# Altium PCB PowerModule.PcbDoc (part 1 of 3)
Units mm, origin at the board's own origin, x right, y up, seen from the top; angles counter-clockwise.
Board outline 200 x 99.95 mm, 2 copper layers (Top Layer 1, Bottom Layer 1); 228 components, 131 nets, 701 pads, 207 vias.
Unrouted connection lines stored in the file: 344.
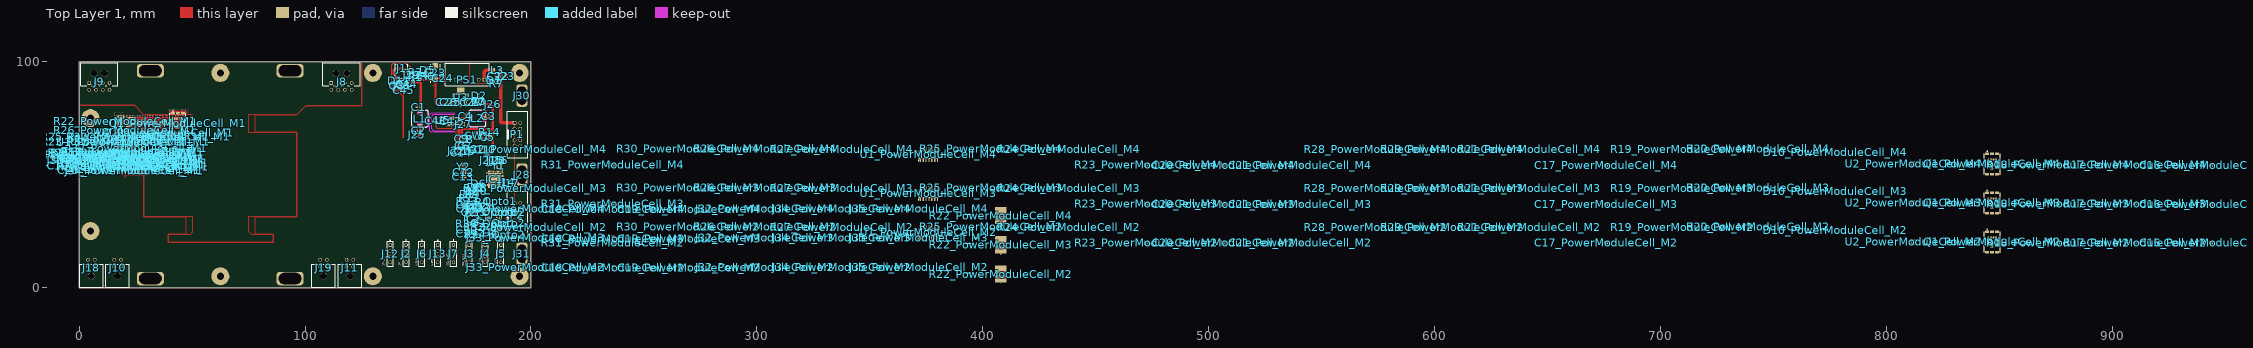
[diagram p0: Top Layer 1 view]
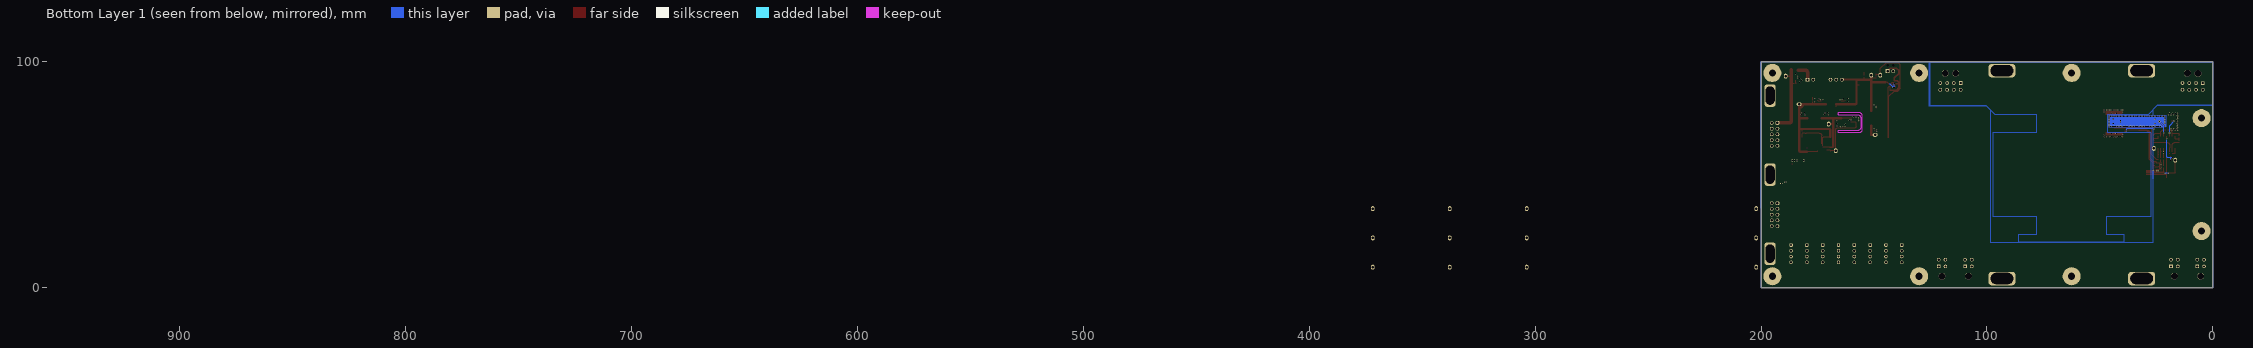
[diagram p1: Bottom Layer 1 view, seen from below]

## Layer stack, top to bottom
Top Solder: solder mask 0.0102, Solder Resist, Dk 3.5
Top Layer 1: signal copper 0.07
Dielectric 1: dielectric 0.32, FR-4, Dk 4.8
Bottom Layer 1: signal copper 0.07
Bottom Solder: solder mask 0.0102, Solder Resist, Dk 3.5

## Board outline
0,0 102.988,0 199.997,0 199.997,99.949 0,99.949
cut-out: 155.194,69.977 155.194,76.073 cw(c156.464,76.073) 156.464,77.343 165.608,77.343 cw(c165.608,76.962) 165.989,76.962 cw(c165.608,76.962) 165.608,76.581 157.226,76.581 ccw(c157.226,75.311) 155.956,75.311 155.956,70.739 ccw(c157.226,70.739) 157.226,69.469 165.608,69.469 cw(c165.608,69.088) 165.989,69.088 cw(c165.608,69.088) 165.608,68.707 156.464,68.707 cw(c156.464,69.977)

## Design rules (kind name [scope] priority, off if disabled: settings)
Clearance [All] p1: gap=0.127 ignorepadtopadclearanceinfootprint=FALSE except(0: Arc-Hole Track-Hole SMDPad-Hole THPad-Hole Via-Hole Fill-Hole Poly-Hole Region-Hole Text-Hole)
PolygonConnect [All] p1: connectstyle=Relief reliefconductorwidth=0.254 reliefentries=4 polygonreliefangle="90 Angle" airgapwidth=0.254
RoomDefinition Opto2 [InComponentClass('Opto2')] p1: confinementstyle=ConfineIn formatcopy=TRUE lockcomponents=FALSE outline 187.579,22.987 187.579,33.782 183.418,33.782 183.418,22.987
RoomDefinition ISO_Signals [InComponentClass('ISO_Signals')] p2: confinementstyle=ConfineIn formatcopy=TRUE lockcomponents=FALSE outline 176.82,22.894 176.82,37.626 170.343,37.626 170.343,22.894
RoomDefinition Opto1 [InComponentClass('Opto1')] p3: confinementstyle=ConfineIn formatcopy=TRUE lockcomponents=FALSE outline 179.504,27.813 183.314,27.813 183.314,38.608 179.504,38.608
RoutingVias [All] p1: holewidth=0.711 width=1.27 viastyle="Through Hole" minholewidth=0.711 minwidth=1.27 maxholewidth=0.711 maxwidth=1.27
SolderMaskExpansion [All] p1: expansion=0.102 istentingtop=FALSE
Width [All] p1: maxlimit=6.35 minlimit=0.127 preferedwidth=0.254
30 further rules are at their usual default settings.

## Classes and differential pairs
component class FanDriver: C44 C45 D11 IC3 Q3
component class Vref-2v5: C42 C43 U5
component class ISO_Signals: C29 C30 C31 C32 IC2
component class LDO_3V3: C25 C26 C27 C28 U3
channel class Optotransistor: Opto1 Opto2
component class Opto2: Q2_Opto2 R33_Opto2 R34_Opto2
component class Opto1: Q2_Opto1 R33_Opto1 R34_Opto1
component class 20V_Isolator: C22 C23 C24 L3 PS1
channel class PowerModuleCell: PowerModuleCell_M1 PowerModuleCell_M2 PowerModuleCell_M3 PowerModuleCell_M4
component class PowerModule: C1 C2 C3 C4 C5 C6 C7 C8 C9 C10 C11 C12 C13 C14 C15 D1 D2 D3 D4 D5 D6 D7 D8 D9 IC1 J1 J2 J3 J4 J5 J6 J7 J8 J9 J10 J11 J12 J13 J14 J15 J16 J17 J18 J19 J20 J21 J22 J23 J24 J25 J26 J27 J28 J29 J30 J31 L1 L2 P1 P2 R1 R2 R3 R4 R5 R6 R7 R8 R9 R10 R11 R12 R13 R14 R15 R16 SW1 Y1 Y2
component class PowerModuleCell_M4: C16_PowerModuleCell_M4 C17_PowerModuleCell_M4 C18_PowerModuleCell_M4 C19_PowerModuleCell_M4 C20_PowerModuleCell_M4 C21_PowerModuleCell_M4 D10_PowerModuleCell_M4 J32_PowerModuleCell_M4 J33_PowerModuleCell_M4 J34_PowerModuleCell_M4 J35_PowerModuleCell_M4 Q1_PowerModuleCell_M4 R17_PowerModuleCell_M4 R18_PowerModuleCell_M4 R19_PowerModuleCell_M4 R20_PowerModuleCell_M4 R21_PowerModuleCell_M4 R22_PowerModuleCell_M4 R23_PowerModuleCell_M4 R24_PowerModuleCell_M4 R25_PowerModuleCell_M4 R26_PowerModuleCell_M4 R27_PowerModuleCell_M4 R28_PowerModuleCell_M4 R29_PowerModuleCell_M4 R30_PowerModuleCell_M4 R31_PowerModuleCell_M4 R32_PowerModuleCell_M4 U1_PowerModuleCell_M4 U2_PowerModuleCell_M4
component class PowerModuleCell_M3: C16_PowerModuleCell_M3 C17_PowerModuleCell_M3 C18_PowerModuleCell_M3 C19_PowerModuleCell_M3 C20_PowerModuleCell_M3 C21_PowerModuleCell_M3 D10_PowerModuleCell_M3 J32_PowerModuleCell_M3 J33_PowerModuleCell_M3 J34_PowerModuleCell_M3 J35_PowerModuleCell_M3 Q1_PowerModuleCell_M3 R17_PowerModuleCell_M3 R18_PowerModuleCell_M3 R19_PowerModuleCell_M3 R20_PowerModuleCell_M3 R21_PowerModuleCell_M3 R22_PowerModuleCell_M3 R23_PowerModuleCell_M3 R24_PowerModuleCell_M3 R25_PowerModuleCell_M3 R26_PowerModuleCell_M3 R27_PowerModuleCell_M3 R28_PowerModuleCell_M3 R29_PowerModuleCell_M3 R30_PowerModuleCell_M3 R31_PowerModuleCell_M3 R32_PowerModuleCell_M3 U1_PowerModuleCell_M3 U2_PowerModuleCell_M3
component class PowerModuleCell_M2: C16_PowerModuleCell_M2 C17_PowerModuleCell_M2 C18_PowerModuleCell_M2 C19_PowerModuleCell_M2 C20_PowerModuleCell_M2 C21_PowerModuleCell_M2 D10_PowerModuleCell_M2 J32_PowerModuleCell_M2 J33_PowerModuleCell_M2 J34_PowerModuleCell_M2 J35_PowerModuleCell_M2 Q1_PowerModuleCell_M2 R17_PowerModuleCell_M2 R18_PowerModuleCell_M2 R19_PowerModuleCell_M2 R20_PowerModuleCell_M2 R21_PowerModuleCell_M2 R22_PowerModuleCell_M2 R23_PowerModuleCell_M2 R24_PowerModuleCell_M2 R25_PowerModuleCell_M2 R26_PowerModuleCell_M2 R27_PowerModuleCell_M2 R28_PowerModuleCell_M2 R29_PowerModuleCell_M2 R30_PowerModuleCell_M2 R31_PowerModuleCell_M2 R32_PowerModuleCell_M2 U1_PowerModuleCell_M2 U2_PowerModuleCell_M2
component class PowerModuleCell_M1: C16_PowerModuleCell_M1 C17_PowerModuleCell_M1 C18_PowerModuleCell_M1 C19_PowerModuleCell_M1 C20_PowerModuleCell_M1 C21_PowerModuleCell_M1 D10_PowerModuleCell_M1 J32_PowerModuleCell_M1 J33_PowerModuleCell_M1 J34_PowerModuleCell_M1 J35_PowerModuleCell_M1 Q1_PowerModuleCell_M1 R17_PowerModuleCell_M1 R18_PowerModuleCell_M1 R19_PowerModuleCell_M1 R20_PowerModuleCell_M1 R21_PowerModuleCell_M1 R22_PowerModuleCell_M1 R23_PowerModuleCell_M1 R24_PowerModuleCell_M1 R25_PowerModuleCell_M1 R26_PowerModuleCell_M1 R27_PowerModuleCell_M1 R28_PowerModuleCell_M1 R29_PowerModuleCell_M1 R30_PowerModuleCell_M1 R31_PowerModuleCell_M1 R32_PowerModuleCell_M1 U1_PowerModuleCell_M1 U2_PowerModuleCell_M1

## Components (designator, comment, footprint, x,y, rotation, side; value= is the part's Value field where it differs from the comment)
C1 "2.2uF, 25V, X5R, 0603" FP-GRM188-0_1-E0_2_0_5-MFG 150.3,79.866 r180 top
C2 "220nF 25V, X7R, 0603" FP-GCM188-0_1-IPC_B 150.3,69.452 r180 top
C3 "2.2uF, 25V, X5R, 0603" FP-GRM188-0_1-E0_2_0_5-MFG 181.356,75.8 r90 top
C4 "220nF 25V, X7R, 0603" FP-GCM188-0_1-IPC_B 171.141,75.8 r90 top
C5 "100nF, 50v, X7R, 0402" CAPC2012X88N 180.903,66.455 r0 top
C6 "10nF, 50V, X7R, 0603" CAPC1608X87N 169.532,62.763 r270 top
C7 "1uF, 50V, X5R, 0402" GRM15X 170.985,62.57 r270 top
C8 "100nF, 50v, X7R, 0402" CAPC2012X88N 171.475,65.768 r90 top
C9 "4.7uF, 50V, X5R, 0805" CAPC2012X145N 169.391,65.773 r90 top
C10 "100nF, 50v, X7R, 0402" CAPC2012X88N 179.705,60.96 r270 top
C11 "4.7uF, 50V, X5R, 0805" CAPC2012X145N 177.583,60.96 r270 top
C12 "100nF, 50v, X7R, 0402" CAPC2012X88N 170.218,51.054 r0 top
C13 "4.7uF, 50V, X5R, 0805" CAPC2012X145N 170.121,48.97 r0 top
C14 "100nF, 50v, X7R, 0402" CAPC2012X88N 169.232,59.759 r90 top
C15 "1uF, 50V, X5R, 0402" GRM15X 170.96,60.263 r90 top
C16_PowerModuleCell_M1 "100nF, 25v, X5R, 0402" FP-GRM155-0_05-IPC_C#1 23.622,58.85 r0 top (schematic designator C16)
C16_PowerModuleCell_M2 "100nF, 25v, X5R, 0402" FP-GRM155-0_05-IPC_C#2 943.864,19.812 r90 top (schematic designator C16)
C16_PowerModuleCell_M3 "100nF, 25v, X5R, 0402" FP-GRM155-0_05-IPC_C#2 943.864,36.957 r90 top (schematic designator C16)
C16_PowerModuleCell_M4 "100nF, 25v, X5R, 0402" FP-GRM155-0_05-IPC_C#2 943.864,54.229 r90 top (schematic designator C16)
C17_PowerModuleCell_M1 "100nF, 25v, X5R, 0402" FP-GRM155-0_05-IPC_C#1 35.179,66.675 r270 top (schematic designator C17)
C17_PowerModuleCell_M2 "100nF, 25v, X5R, 0402" FP-GRM155-0_05-IPC_C#2 676.021,19.812 r90 top (schematic designator C17)
C17_PowerModuleCell_M3 "100nF, 25v, X5R, 0402" FP-GRM155-0_05-IPC_C#2 676.021,36.957 r90 top (schematic designator C17)
C17_PowerModuleCell_M4 "100nF, 25v, X5R, 0402" FP-GRM155-0_05-IPC_C#2 676.021,54.229 r90 top (schematic designator C17)
C18_PowerModuleCell_M1 "100nF, 50v, X7R, 0402" CAPC2012X88N 19.495,57.541 r0 top (schematic designator C18)
C18_PowerModuleCell_M2 "100nF, 50v, X7R, 0402" CAPC2012X88N 236.347,8.763 r90 top (schematic designator C18)
C18_PowerModuleCell_M3 "100nF, 50v, X7R, 0402" CAPC2012X88N 236.347,21.717 r90 top (schematic designator C18)
C18_PowerModuleCell_M4 "100nF, 50v, X7R, 0402" CAPC2012X88N 236.347,34.671 r90 top (schematic designator C18)
C19_PowerModuleCell_M1 "100nF, 50v, X7R, 0402" CAPC2012X88N 17.427,54.012 r180 top (schematic designator C19)
C19_PowerModuleCell_M2 "100nF, 50v, X7R, 0402" CAPC2012X88N 270.002,8.763 r90 top (schematic designator C19)
C19_PowerModuleCell_M3 "100nF, 50v, X7R, 0402" CAPC2012X88N 270.002,21.717 r90 top (schematic designator C19)
C19_PowerModuleCell_M4 "100nF, 50v, X7R, 0402" CAPC2012X88N 270.002,34.671 r90 top (schematic designator C19)
C20_PowerModuleCell_M1 "470nF, 50v, X7R, 0603" FP-C1608-080-0_1-IPC_C 22.281,51.835 r180 top (schematic designator C20)
C20_PowerModuleCell_M2 "470nF, 50v, X7R, 0603" FP-C1608-080-0_1-IPC_C 506.603,19.812 r90 top (schematic designator C20)
C20_PowerModuleCell_M3 "470nF, 50v, X7R, 0603" FP-C1608-080-0_1-IPC_C 506.603,36.957 r90 top (schematic designator C20)
C20_PowerModuleCell_M4 "470nF, 50v, X7R, 0603" FP-C1608-080-0_1-IPC_C 506.603,54.229 r90 top (schematic designator C20)
C21_PowerModuleCell_M1 "470nF, 50v, X7R, 0603" FP-C1608-080-0_1-IPC_C 22.281,55.293 r180 top (schematic designator C21)
C21_PowerModuleCell_M2 "470nF, 50v, X7R, 0603" FP-C1608-080-0_1-IPC_C 540.512,19.812 r90 top (schematic designator C21)
C21_PowerModuleCell_M3 "470nF, 50v, X7R, 0603" FP-C1608-080-0_1-IPC_C 540.512,36.957 r90 top (schematic designator C21)
C21_PowerModuleCell_M4 "470nF, 50v, X7R, 0603" FP-C1608-080-0_1-IPC_C 540.512,54.229 r90 top (schematic designator C21)
C22 "4.7uF, 25V, X5S, 0805" CAPC2012X145N 185.45,93.517 r0 top
C23 "10uF, 50V, 10%, 2917" T491D 157.71,95.123 r90 top
C24 "1uF, 50V, X5R, 0402" GRM15X 160.935,92.71 r270 top
C25 "1uF, 50V, X5R, 0402" GRM15X 164.592,82 r270 top
C26 "100nF, 50v, X7R, 0402" CAPC2012X88N 162.814,82 r270 top
C27 "100nF, 50v, X7R, 0402" CAPC2012X88N 175.031,82 r270 top
C28 "1uF, 50V, X5R, 0402" GRM15X 173.329,82 r270 top
C29 "100nF, 50v, X7R, 0402" CAPC2012X88N 171.74,23.73 r180 top
C30 "10nF, 50V, X7R, 06023" CAPC1608X87N 171.867,25.565 r180 top
C31 "10nF, 50V, X7R, 06023" CAPC1608X87N 171.867,34.903 r180 top
C32 "100nF, 50v, X7R, 0402" CAPC2012X88N 171.867,36.737 r180 top
C42 "10uF, 50V, X5R, 1206" FP-CL32-IPC_B 164.541,73.719 r270 top
C43 "4.7uF, 50V, X5R, 0805" CAPC2012X145N 157.959,73.914 r270 top
C44 "4.7uF, 50V, X5R, 0805" CAPC2012X145N 145.012,90.049 r90 top
C45 "4.7uF, 50V, X5R, 0805" CAPC2012X145N 143.764,87.39 r180 top
D1 "150060YS75000" WL-SMCW_0603_150060XX75000 183.692,91.694 r0 top
D2 "150060AS75000" WL-SMCW_0603_150060XX75000 177.038,85.001 r270 top
D3 "150060RS75000" WL-SMCW_0603_150060XX75000 178.811,35.318 r90 top
D4 "150060RS75000" WL-SMCW_0603_150060XX75000 182.289,24.307 r90 top
D5 "150060GS75000" WL-SMCW_0603_150060XX75000 154.25,96.139 r270 top
D6 "150060GS75000" WL-SMCW_0603_150060XX75000 176.911,46.031 r0 top
D7 "150060BS75000" WL-SMCW_0603_150060XX75000 173.609,42.856 r0 top
D8 "150060GS75000" WL-SMCW_0603_150060XX75000 175.233,44.36 r0 top
D9 "150060BS75000" WL-SMCW_0603_150060XX75000 171.999,41.309 r0 top
D10_PowerModuleCell_M1 "150060RS75000" WL-SMCW_0603_150060XX75000 24.266,54.294 r270 top (schematic designator D10)
D10_PowerModuleCell_M2 "150060RS75000" WL-SMCW_0603_150060xx75000 777.494,25.273 r90 top (schematic designator D10)
D10_PowerModuleCell_M3 "150060RS75000" WL-SMCW_0603_150060xx75000 777.494,42.545 r90 top (schematic designator D10)
D10_PowerModuleCell_M4 "150060RS75000" WL-SMCW_0603_150060xx75000 777.494,59.817 r90 top (schematic designator D10)
D11 "CDBU0245" DIOC1709X85N 141.605,91.569 r0 top
IC1 "STM32G431CBU6" QFN50P700X700X65-49N-D 183.924,47.9 r270 top
IC2 "ADUM1440ARQZ" SOP64P600X175-16N 174.173,30.234 r90 top
IC3 "TCK402G" BGA6C40P2X3_80X120X59 143.056,89.6 r0 top
J1 "1725656" 1725656 144.018,95.835 r180 top
J2 "61300411821" 61300411821 144.71,15 r270 top net-tie
J3 "61300411821" 61300411821 172.71,15 r270 top net-tie
J4 "61300411821" 61300411821 179.71,15 r270 top net-tie
J5 "61300411821" 61300411821 186.71,15 r270 top net-tie
J6 "61300411821" 61300411821 151.71,15 r270 top net-tie
J7 "61300411821" 61300411821 165.71,15 r270 top net-tie
J8 "43045-0802" FP-43045-0802-MFG 116.14,94.516 r180 top locked
J9 "43045-0802" FP-43045-0802-MFG 8.92,94.5 r180 top locked
J10 "43045-0400" FP-43045-0400-MFG 17.018,5.4 r0 top locked
J11 "43045-0400" FP-43045-0400-MFG 119.888,5.4 r0 top locked
J12 "61300411821" 61300411821 137.71,15 r270 top net-tie
J13 "61300411821" 61300411821 158.71,15 r270 top net-tie
J14 "TestPad" TESTPAD#1 189.23,46.99 r180 top
J15 "TestPad" TESTPAD#1 184.447,56.261 r90 top
J16 "TestPad" TESTPAD#1 185.885,56.261 r270 top
J17 "TestPad" TESTPAD#1 191.008,46.398 r180 top
J18 "43045-0400" FP-43045-0400-MFG 5.4,5.4 r0 top locked
J19 "43045-0400" FP-43045-0400-MFG 108.204,5.4 r0 top locked
J20 "TestPad" TESTPAD#1 184.869,56.224 r270 top
J21 "TestPad" TESTPAD#1 181.399,56.261 r90 top
J22 "TestPad" TESTPAD#2 167.259,60.579 r90 top
J23 "TestPad" TESTPAD#2 188.849,93.599 r270 top
J24 "TestPad" TESTPAD#3 150.905,93.98 r270 top
J25 "TestPad" TESTPAD#2 149.479,67.861 r180 top
J26 "TestPad" TESTPAD#2 183.134,80.856 r0 top
J27 "TestPad" TESTPAD#2 169.799,72.39 r270 top
J28 "TestPad" TESTPAD#4 196.596,47.752 r90 top
J29 "TestPad" TESTPAD#5 146.896,93.853 r270 top
J30 "TestPad" TESTPAD#6 197.612,82.169 r90 top
J31 "TestPad" TESTPAD#7 195.935,16.404 r90 top
J32_PowerModuleCell_M1 "TestPad" TESTPAD#2 26.407,61.595 r90 top (schematic designator J32)
J32_PowerModuleCell_M2 "TestPad" TestPad#1 303.784,9.017 r90 top (schematic designator J32)
J32_PowerModuleCell_M3 "TestPad" TestPad#1 303.784,21.971 r90 top (schematic designator J32)
J32_PowerModuleCell_M4 "TestPad" TestPad#1 303.784,34.925 r90 top (schematic designator J32)
J33_PowerModuleCell_M1 "TestPad" TESTPAD#2 16.34,56.383 r270 top (schematic designator J33)
J33_PowerModuleCell_M2 "TestPad" TestPad#1 202.184,9.017 r90 top (schematic designator J33)
J33_PowerModuleCell_M3 "TestPad" TestPad#1 202.184,21.971 r90 top (schematic designator J33)
J33_PowerModuleCell_M4 "TestPad" TestPad#1 202.184,34.925 r90 top (schematic designator J33)
J34_PowerModuleCell_M1 "TestPad" TestPad#2 24.511,51.689 r0 top (schematic designator J34)
J34_PowerModuleCell_M2 "TestPad" TestPad#1 337.82,9.017 r90 top (schematic designator J34)
J34_PowerModuleCell_M3 "TestPad" TestPad#1 337.82,21.971 r90 top (schematic designator J34)
J34_PowerModuleCell_M4 "TestPad" TestPad#1 337.82,34.925 r90 top (schematic designator J34)
J35_PowerModuleCell_M1 "TestPad" TestPad#2 21.769,59.664 r90 top (schematic designator J35)
J35_PowerModuleCell_M2 "TestPad" TestPad#1 371.856,9.017 r90 top (schematic designator J35)
J35_PowerModuleCell_M3 "TestPad" TestPad#1 371.856,21.971 r90 top (schematic designator J35)
J35_PowerModuleCell_M4 "TestPad" TestPad#1 371.856,34.925 r90 top (schematic designator J35)
L1 "39 µH, 1A" WE-PD_7345 150.876,74.786 r90 top
L2 "39 µH, 1A" WE-PD_7345 176.327,74.93 r0 top
L3 "10uH, 10%, 1210" BOUR-CM322522_V 185,96.184 r180 top
P1 "61201021621" 61201021621 194,67.795 r270 top
P2 "61201021621" 61201021621 194,32.295 r270 top
PS1 "MGJ2D122005BSC" MGJ2D122005BSC 179.425,92.075 r180 top
Q1_PowerModuleCell_M1 "IRF7779L2TRPBF" FP-MG-WDSON-11-MFG 43.725,72.687 r90 top (schematic designator Q1)
Q1_PowerModuleCell_M2 "IRF7779L2TRPBF" FP-MG-WDSON-11-MFG 846.836,20.193 r90 top (schematic designator Q1)
Q1_PowerModuleCell_M3 "IRF7779L2TRPBF" FP-MG-WDSON-11-MFG 846.836,37.465 r90 top (schematic designator Q1)
Q1_PowerModuleCell_M4 "IRF7779L2TRPBF" FP-MG-WDSON-11-MFG 846.836,54.737 r90 top (schematic designator Q1)
Q2_Opto1 "TLP291_Y,SE_T" SOIC127P700X220-4N 181.409,33.343 r90 top (schematic designator Q2)
Q2_Opto2 "TLP291_Y,SE_T" SOIC127P700X220-4N 185.547,28.465 r90 top (schematic designator Q2)
Q3 "SI1029X-T1-GE3" SOTFL50P160X60-6N 140.923,89.409 r90 top
R1 "10K 1%, 0402" FP-ERA2A-MFG 148.971,93.091 r270 top value=10kΩ
R2 "2K 1%, 0402" FP-ERJ2RK-MFG 148.971,95.27 r270 top
R3 "47 1%, 0402" FP-ERJ2RK-IPC_C 177.038,82.586 r270 top
R4 "47 1%, 0402" FP-ERJ2RK-IPC_C 178.756,37.79 r90 top
R5 "47 1%, 0402" FP-ERJ2RK-IPC_C 182.24,26.741 r90 top
R6 "1K80 1%, 0402" RESC1005X40X25NL10T10 154.25,93.472 r270 top
R7 "511 1%, 0402" RESC1005X40X25ML05T05 184.912,90.17 r0 top
R8 "180 1%, 0402" RESC1005X40X25NL05T05 177.673,44.227 r90 top
R9 "180 1%, 0402" RESC1005X40X25NL05T05 174.371,41.052 r90 top
R10 "180 1%, 0402" RESC1005X40X25NL05T05 176.022,42.556 r90 top
R11 "180 1%, 0402" RESC1005X40X25NL05T05 172.819,39.505 r90 top
R12 "4K7 1%, 0402" RESC1005X40X25LL05T05 175.695,35.7 r90 top
R13 "4K7 1%, 0402" RESC1005X40X25LL05T05 174.552,35.754 r90 top
R14 "10K 5%, 0402" RESC1005X40X25ML05T05 181.737,68.707 r270 top
R15 "4K7 1%, 0402" RESC1005X40X25LL05T05 34.013,66.799 r90 top
R16 "4K7 1%, 0402" RESC1005X40X25LL05T05 32.893,66.821 r270 top
R17_PowerModuleCell_M1 "10K 1%, 0402" FP-ERA2A-MFG 23.622,60.114 r180 top value=10kΩ (schematic designator R17)
R17_PowerModuleCell_M2 "10K 1%, 0402" FP-ERA2A-MFG 910.082,19.812 r90 top value=10kΩ (schematic designator R17)
R17_PowerModuleCell_M3 "10K 1%, 0402" FP-ERA2A-MFG 910.082,37.084 r90 top value=10kΩ (schematic designator R17)
R17_PowerModuleCell_M4 "10K 1%, 0402" FP-ERA2A-MFG 910.082,54.356 r90 top value=10kΩ (schematic designator R17)
R18_PowerModuleCell_M1 "47 1%, 0402" FP-ERJ2RK-IPC_C 25.695,53.573 r90 top (schematic designator R18)
R18_PowerModuleCell_M2 "47 1%, 0402" FP-ERJ2RK-IPC_C 876.173,19.812 r90 top (schematic designator R18)
R18_PowerModuleCell_M3 "47 1%, 0402" FP-ERJ2RK-IPC_C 876.173,37.084 r90 top (schematic designator R18)
R18_PowerModuleCell_M4 "47 1%, 0402" FP-ERJ2RK-IPC_C 876.173,54.356 r90 top (schematic designator R18)
R19_PowerModuleCell_M1 "1K 1%, 0402" RESC1005X40X25NL05T05 22.994,57.023 r90 top (schematic designator R19)
R19_PowerModuleCell_M2 "1K 1%, 0402" RESC1005X40X25NL05T05 709.549,26.797 r90 top (schematic designator R19)
R19_PowerModuleCell_M3 "1K 1%, 0402" RESC1005X40X25NL05T05 709.549,44.069 r90 top (schematic designator R19)
R19_PowerModuleCell_M4 "1K 1%, 0402" RESC1005X40X25NL05T05 709.549,61.341 r90 top (schematic designator R19)
R20_PowerModuleCell_M1 "4K7 1%, 0402" RESC1005X40X25LL05T05 25.654,55.338 r270 top (schematic designator R20)
R20_PowerModuleCell_M2 "4K7 1%, 0402" RESC1005X40X25LL05T05 743.204,26.924 r90 top (schematic designator R20)
R20_PowerModuleCell_M3 "4K7 1%, 0402" RESC1005X40X25LL05T05 743.204,44.196 r90 top (schematic designator R20)
R20_PowerModuleCell_M4 "4K7 1%, 0402" RESC1005X40X25LL05T05 743.204,61.468 r90 top (schematic designator R20)
R21_PowerModuleCell_M1 "1K 1%, 0402" RESC1005X40X25NL05T05 24.264,57.023 r270 top (schematic designator R21)
R21_PowerModuleCell_M2 "1K 1%, 0402" RESC1005X40X25NL05T05 641.985,26.797 r90 top (schematic designator R21)
R21_PowerModuleCell_M3 "1K 1%, 0402" RESC1005X40X25NL05T05 641.985,44.069 r90 top (schematic designator R21)
R21_PowerModuleCell_M4 "1K 1%, 0402" RESC1005X40X25NL05T05 641.985,61.341 r90 top (schematic designator R21)
R22_PowerModuleCell_M1 "10m 1%, 2818" WSHP28181L000FEB 20.418,73.569 r180 top (schematic designator R22)
R22_PowerModuleCell_M2 "10m 1%, 2818" WSHP28181L000FEB 407.924,5.969 r90 top (schematic designator R22)
R22_PowerModuleCell_M3 "10m 1%, 2818" WSHP28181L000FEB 407.924,18.923 r90 top (schematic designator R22)
R22_PowerModuleCell_M4 "10m 1%, 2818" WSHP28181L000FEB 407.924,31.877 r90 top (schematic designator R22)
R23_PowerModuleCell_M1 "300 1%, 0402" FP-ERJ2RK-IPC_A 14.769,64.599 r90 top (schematic designator R23)
R23_PowerModuleCell_M2 "300 1%, 0402" FP-ERJ2RK-IPC_A 472.44,19.812 r90 top (schematic designator R23)
R23_PowerModuleCell_M3 "300 1%, 0402" FP-ERJ2RK-IPC_A 472.44,37.084 r90 top (schematic designator R23)
R23_PowerModuleCell_M4 "300 1%, 0402" FP-ERJ2RK-IPC_A 472.44,54.356 r90 top (schematic designator R23)
R24_PowerModuleCell_M1 "1K 1%, 0402" RESC1005X40X25NL05T05 17.914,59.664 r270 top (schematic designator R24)
R24_PowerModuleCell_M2 "1K 1%, 0402" RESC1005X40X25NL05T05 438.023,26.797 r90 top (schematic designator R24)
R24_PowerModuleCell_M3 "1K 1%, 0402" RESC1005X40X25NL05T05 438.023,44.069 r90 top (schematic designator R24)
R24_PowerModuleCell_M4 "1K 1%, 0402" RESC1005X40X25NL05T05 438.023,61.341 r90 top (schematic designator R24)
R25_PowerModuleCell_M1 "100 1%, 0402" RESC1005X40X25LL05T05 14.769,66.764 r270 top (schematic designator R25)
R25_PowerModuleCell_M2 "100 1%, 0402" RESC1005X40X25LL05T05 403.86,26.924 r90 top (schematic designator R25)
R25_PowerModuleCell_M3 "100 1%, 0402" RESC1005X40X25LL05T05 403.86,44.196 r90 top (schematic designator R25)
R25_PowerModuleCell_M4 "100 1%, 0402" RESC1005X40X25LL05T05 403.86,61.468 r90 top (schematic designator R25)
R26_PowerModuleCell_M1 "100 1%, 0402" RESC1005X40X25LL05T05 20.454,69.634 r180 top (schematic designator R26)
R26_PowerModuleCell_M2 "100 1%, 0402" RESC1005X40X25LL05T05 303.657,26.924 r90 top (schematic designator R26)
R26_PowerModuleCell_M3 "100 1%, 0402" RESC1005X40X25LL05T05 303.657,44.196 r90 top (schematic designator R26)
R26_PowerModuleCell_M4 "100 1%, 0402" RESC1005X40X25LL05T05 303.657,61.468 r90 top (schematic designator R26)
R27_PowerModuleCell_M1 "1K 1%, 0402" RESC1005X40X25NL05T05 16.644,58.764 r270 top (schematic designator R27)
R27_PowerModuleCell_M2 "1K 1%, 0402" RESC1005X40X25NL05T05 337.693,26.797 r90 top (schematic designator R27)
R27_PowerModuleCell_M3 "1K 1%, 0402" RESC1005X40X25NL05T05 337.693,44.069 r90 top (schematic designator R27)
R27_PowerModuleCell_M4 "1K 1%, 0402" RESC1005X40X25NL05T05 337.693,61.341 r90 top (schematic designator R27)
R28_PowerModuleCell_M1 "1K 1%, 0402" RESC1005X40X25NL05T05 21.717,53.564 r270 top (schematic designator R28)
R28_PowerModuleCell_M2 "1K 1%, 0402" RESC1005X40X25NL05T05 573.913,26.797 r90 top (schematic designator R28)
R28_PowerModuleCell_M3 "1K 1%, 0402" RESC1005X40X25NL05T05 573.913,44.069 r90 top (schematic designator R28)
R28_PowerModuleCell_M4 "1K 1%, 0402" RESC1005X40X25NL05T05 573.913,61.341 r90 top (schematic designator R28)
R29_PowerModuleCell_M1 "1K 1%, 0402" RESC1005X40X25NL05T05 21.717,57.022 r270 top (schematic designator R29)
R29_PowerModuleCell_M2 "1K 1%, 0402" RESC1005X40X25NL05T05 607.949,26.797 r90 top (schematic designator R29)
R29_PowerModuleCell_M3 "1K 1%, 0402" RESC1005X40X25NL05T05 607.949,44.069 r90 top (schematic designator R29)
R29_PowerModuleCell_M4 "1K 1%, 0402" RESC1005X40X25NL05T05 607.949,61.341 r90 top (schematic designator R29)
R30_PowerModuleCell_M1 "100 1%, 0402" RESC1005X40X25LL05T05 26.072,66.764 r90 top (schematic designator R30)
R30_PowerModuleCell_M2 "100 1%, 0402" RESC1005X40X25LL05T05 269.621,26.924 r90 top (schematic designator R30)
R30_PowerModuleCell_M3 "100 1%, 0402" RESC1005X40X25LL05T05 269.621,44.196 r90 top (schematic designator R30)
R30_PowerModuleCell_M4 "100 1%, 0402" RESC1005X40X25LL05T05 269.621,61.468 r90 top (schematic designator R30)
R31_PowerModuleCell_M1 "300 1%, 0402" FP-ERJ2RK-IPC_A 26.104,64.599 r90 top (schematic designator R31)
R31_PowerModuleCell_M2 "300 1%, 0402" FP-ERJ2RK-IPC_A 236.22,19.812 r90 top (schematic designator R31)
R31_PowerModuleCell_M3 "300 1%, 0402" FP-ERJ2RK-IPC_A 236.22,37.084 r90 top (schematic designator R31)
R31_PowerModuleCell_M4 "300 1%, 0402" FP-ERJ2RK-IPC_A 236.22,54.356 r90 top (schematic designator R31)
R32_PowerModuleCell_M1 "1K 1%, 0402" RESC1005X40X25NL05T05 19.184,59.664 r270 top (schematic designator R32)
R32_PowerModuleCell_M2 "1K 1%, 0402" RESC1005X40X25NL05T05 201.803,26.797 r90 top (schematic designator R32)
R32_PowerModuleCell_M3 "1K 1%, 0402" RESC1005X40X25NL05T05 201.803,44.069 r90 top (schematic designator R32)
R32_PowerModuleCell_M4 "1K 1%, 0402" RESC1005X40X25NL05T05 201.803,61.341 r90 top (schematic designator R32)
R33_Opto1 "4K7 1%, 0402" RESC1005X40X25LL05T05 180.335,38.238 r0 top (schematic designator R33)
R33_Opto2 "4K7 1%, 0402" RESC1005X40X25LL05T05 184.43,33.36 r0 top (schematic designator R33)
R34_Opto1 "68 1%, 0402" FP-ERJ2RK-MFG 180.204,28.323 r0 top (schematic designator R34)
R34_Opto2 "68 1%, 0402" FP-ERJ2RK-MFG 184.303,23.445 r0 top (schematic designator R34)
SW1 "PTS810SJM250SMTRLFS" FP-PTS810SJM250SMTRLFS-MFG 176.364,67.298 r180 top
U1_PowerModuleCell_M1 "LM324DR2G" ONSC-SOIC-14-751A-03_V 20.454,64.261 r90 top (schematic designator U1)
U1_PowerModuleCell_M2 "LM324DR2G" ONSC-SOIC-14-751A-03_V 376.174,24.384 r90 top (schematic designator U1)
U1_PowerModuleCell_M3 "LM324DR2G" ONSC-SOIC-14-751A-03_V 376.174,41.656 r90 top (schematic designator U1)
U1_PowerModuleCell_M4 "LM324DR2G" ONSC-SOIC-14-751A-03_V 376.174,58.928 r90 top (schematic designator U1)
U2_PowerModuleCell_M1 "TMP117MAIYBGR" FP-YBG0006-MFG 38.335,68.507 r90 top (schematic designator U2)
U2_PowerModuleCell_M2 "TMP117MAIYBGR" FP-YBG0006-MFG 812.038,20.32 r90 top (schematic designator U2)
U2_PowerModuleCell_M3 "TMP117MAIYBGR" FP-YBG0006-MFG 812.038,37.592 r90 top (schematic designator U2)
U2_PowerModuleCell_M4 "TMP117MAIYBGR" FP-YBG0006-MFG 812.038,54.864 r90 top (schematic designator U2)
U3 "TC1262-3.3VDBTR" SOT-223-DB3_M 168.96,84.328 r90 top
U5 "LM4132AMF-2.5/NOPB" FP-DBV0005A-IPC_C 160.881,74.041 r180 top
Y1 "SIT1552AC-JE-DCC-32.768D" FP-SIT1552-J-MFG 185.85,53.967 r270 top
Y2 "ECS-TXO-2016-33-160-TR" FP-TXO-2016-MFG 170.292,53.523 r0 top

## Footprints (in the part's own frame and the unit in brackets; to place one, negate y for a bottom-side part, rotate by r counter-clockwise, add the part's x,y. Pads: shape width x height; smd on the part's side, far side on the other; paste and mask are expansions set on the pad)
1725656 [mm]
  rect 1.65x1.65 hole 1.1: 1(0,0)
  round 1.65 hole 1.1: 2(2.54,0)
  round 0.55 hole 1.1 unplated: MH1(0,-2.54) MH2(2.54,-2.54)
  silkscreen extent -1.5,-3.1 4.04,3.1, body extent -1.5,-3.1 4.04,3.1, height 9
61201021621 [mm] "10 pins, straight, gold plating"
  rrect50% 1.6x1.6 hole 1.1: 1(-5.08,-1.27)
  round 1.6 hole 1.1: 2(-5.08,1.27) 3(-2.54,-1.27) 4(-2.54,1.27) 5(0,-1.27) 6(0,1.27) 7(2.54,-1.27) 8(2.54,1.27) 9(5.08,-1.27) 10(5.08,1.27)
  silkscreen extent -10.28,-4.5 10.28,4.5, body extent -10.18,-4.42 10.18,4.75, height 9.13
61300411821 [mm] "Socket Header, Pitch 2.54 mm, THT, Vertical, single row, 4p"
  rrect50% 1.52x1.52 hole 1.02: 1(-3.81,0)
  round 1.52 hole 1.02: 2(-1.27,0) 3(1.27,0) 4(3.81,0)
  silkscreen extent -6.06,-1.35 5.46,1.35, body extent -5.33,-1.25 5.33,1.25, height 8.55
BGA6C40P2X3_80X120X59 [mm]
  round 0.208 smd: A1(-0.2,0.4) A2(0.2,0.4) B1(-0.2,0) B2(0.2,0) C1(-0.2,-0.4) C2(0.2,-0.4)
  silkscreen extent -0.75,-0.85 0.65,0.95, body extent -0.4,-0.6 0.4,0.6, height 0.55
BOUR-CM322522_V [mm] "Inductor, 2-Leads, Body 3.2x2.5mm, Pitch 3.05mm"
  rect 1.25x2.15 smd: 1(-1.525,0) 2(1.525,0)
  body extent -1.77,-1.35 1.77,1.35, height 2.4
CAPC1608X87N [mm]
  rect 0.78x0.98 smd: 1(-0.7,0) 2(0.7,0)
  body extent -0.87,-0.48 0.88,0.47, height 0.87
CAPC2012X88N [mm]
  rect 1.02x1.47 smd: 1(-0.8,0) 2(0.8,0)
  body extent -1.1,-0.73 1.1,0.72, height 0.88
CAPC2012X145N [mm]
  rect 0.97x1.47 smd: 1(-0.83,0) 2(0.83,0)
  body extent -1,-0.63 1,0.63, height 1.45
DIOC1709X85N [mm]
  rect 1.2x1.05 smd: 1(-0.65,0) 2(0.65,0)
  silkscreen extent -1.65,-0.51 -1.65,0.51, body extent -0.85,-0.45 0.85,0.45, height 0.85
FP-43045-0400-MFG [mm]
  rect 1.57x1.57 hole 1.02 paste-1000 mask+0: 1(1.5,3.965)
  round 1.57 hole 1.02 paste-1000 mask+0: 2(-1.5,3.965) 3(1.5,6.965) 4(-1.5,6.965)
  round 3 hole 3 unplated paste-1000 mask+0: ""(0,-0.355)
  silkscreen extent -5.2,-5.21 5.2,4.95, body extent -5.3,-5.31 5.3,7.85, height 0.25
FP-43045-0802-MFG [mm]
  rect 1.57x1.57 hole 1.02 paste-1000 mask+0: 1(4.49,3.965)
  round 1.57 hole 1.02 paste-1000 mask+0: 2(1.49,3.965) 3(-1.51,3.965) 4(-4.51,3.965) 5(4.49,6.965) 6(1.49,6.965) 7(-1.51,6.965) 8(-4.51,6.965)
  round 3 hole 3 unplated paste-1000 mask+0: ""(-2.35,-0.355) ""(2.35,-0.355)
  silkscreen extent -8.2,-5.08 8.2,5.08, body extent -8.3,-5.18 8.3,7.85, height 0.25
FP-C1608-080-0_1-IPC_C [mm]
  rect 0.931x0.812 smd paste+0 mask+0: 1(-0.541,0) 2(0.541,0)
  body extent -1.11,-0.55 1.11,0.55, height 0.25
FP-CL32-IPC_B [mm]
  rect 1.653x2.804 smd paste+0 mask+0: 1(-1.325,0) 2(1.325,0)
  body extent -2.4,-1.65 2.4,1.65, height 0.25
FP-DBV0005A-IPC_C [mm]
  rect 1.205x0.532 smd paste+0 mask+0: 1(-1.05,0.95)
  rrect100% 1.205x0.532 smd paste+0 mask+0: 2(-1.05,0) 3(-1.05,-0.95) 4(1.05,-0.95) 5(1.05,0.95)
  body extent -1.75,-1.55 1.75,1.55, height 0.25
FP-ERA2A-MFG [mm]
  rect 0.475x0.5 smd paste+0 mask+0: 1(-0.512,0) 2(0.512,0)
  silkscreen extent -0.55,-0.65 0.55,0.65, body extent -0.85,-0.4 0.85,0.4, height 0.25
FP-ERJ2RK-IPC_A [mm]
  rect 0.668x0.672 smd paste+0 mask+0: 1(-0.502,0) 2(0.502,0)
  body extent -1.04,-0.54 1.04,0.54, height 0.25
FP-ERJ2RK-IPC_C [mm]
  rect 0.468x0.472 smd paste+0 mask+0: 1(-0.402,0) 2(0.402,0)
  body extent -0.74,-0.38 0.74,0.38, height 0.25
FP-ERJ2RK-MFG [mm]
  rect 0.475x0.5 smd paste+0 mask+0: 1(-0.513,0) 2(0.513,0)
  body extent -0.85,-0.38 0.85,0.38, height 0.25
FP-GCM188-0_1-IPC_B [mm]
  rect 0.959x0.912 smd paste+0 mask+0: 1(-0.727,0) 2(0.727,0)
  body extent -1.46,-0.71 1.46,0.71, height 0.25
FP-GRM155-0_05-IPC_C#1 [mil]
  rect 20.29x18.6 smd paste+0 mask+0: 1(-15,0) 2(14.9,0)
  body extent -29,-15 29,15, height 10
FP-GRM155-0_05-IPC_C#2 [mil]
  rect 20.29x18.6 smd paste+0 mask+0: 1(-14.9,0) 2(14.9,0)
  silkscreen extent -25,-27 25,27, body extent -29,-15 29,15, height 10
FP-GRM188-0_1-E0_2_0_5-MFG [mm]
  rect 0.65x0.7 smd paste+0 mask+0: 1(-0.675,0) 2(0.675,0)
  body extent -1.1,-0.55 1.1,0.55, height 0.25
FP-MG-WDSON-11-MFG [mm]
  rect 1.1x1.7 smd paste-1000 mask+0: 1(4.5,2.2) 2(4.5,0) 3(4.5,-2.2) 13(-4.5,2.2) 14(-4.5,0) 15(-4.5,-2.2)
  rect 1.1x0.85 smd paste-1000 mask+0: 4(1.95,1.725) 5(1.95,0.575) 6(1.95,-0.575) 7(1.95,-1.725) 8(-0.85,1.725) 9(-0.85,0.575) 10(-0.85,-0.575) 11(-0.85,-1.725)
  rect 0.7x1.3 smd paste-1000 mask+0: 12(-2.25,0)
  silkscreen extent -4.57,-3.55 5.72,3.55, body extent -5.15,-3.65 5.15,3.65, height 0.25
FP-PTS810SJM250SMTRLFS-MFG [mm]
  rect 1.05x0.65 smd paste+0 mask+0: 1(-2.075,1.075) 2(2.075,1.075) 3(-2.075,-1.075) 4(2.075,-1.075)
  silkscreen extent -2.1,-1.6 2.1,1.6, body extent -2.7,-1.7 2.7,1.7, height 0.25
FP-SIT1552-J-MFG [mm]
  round 0.25 smd paste+0 mask-1000: 1(-0.5,-0.205) 2(0.5,-0.205) 3(0.5,0.205) 4(-0.5,0.205)
  silkscreen extent -1.87,-0.79 1.14,0.79, body extent -1.29,-0.94 1.29,0.94, height 0.25
FP-TXO-2016-MFG [mm]
  rect 0.8x0.7 smd paste+0 mask+0: 1(-0.65,-0.5) 2(0.65,-0.5) 3(0.65,0.5) 4(-0.65,0.5)
  silkscreen extent -1.92,-1.2 1,1.2, body extent -1.15,-0.95 1.15,0.95, height 0.25
FP-YBG0006-MFG [mm]
  round 0.23 smd paste-1000 mask-1000: A1(-0.2,0.4) A2(0.2,0.4) B1(-0.2,0) B2(0.2,0) C1(-0.2,-0.4) C2(0.2,-0.4)
  silkscreen extent -1.35,-1.1 0.85,1.1, body extent -1,-1.25 1,1.25, height 0.25
GRM15X [mm]
  rect 0.45x0.6 smd: 1(-0.475,0) 2(0.475,0)
  body extent -0.5,-0.28 0.5,0.27, height 0.5
MGJ2D122005BSC [mm]
  rect 1.612x1.612 hole 1.075: 1(0,0)
  round 1.612 hole 1.075: 2(2.54,0) 5(10.16,0) 6(12.7,0) 7(15.24,0)
  silkscreen extent -2.13,-7.13 17.37,2.67, body extent -2.13,-7.13 17.37,2.67, height 12.85
ONSC-SOIC-14-751A-03_V [mm] "SOIC, 14-Leads, Body 8.75x4mm, Pitch 1.27mm"
  rect 1.18x0.58 smd: 1(-2.66,3.81) 2(-2.66,2.54) 3(-2.66,1.27) 4(-2.66,0) 5(-2.66,-1.27) 6(-2.66,-2.54) 7(-2.66,-3.81) 8(2.66,-3.81) 9(2.66,-2.54) 10(2.66,-1.27) 11(2.66,0) 12(2.66,1.27) 13(2.66,2.54) 14(2.66,3.81)
  silkscreen extent -1.67,-4.38 1.67,4.38, body extent -2,-4.38 2,4.38, height 1.75
QFN50P700X700X65-49N-D [mm]
  rect 0.85x0.3 smd: 1(-3.45,2.75) 2(-3.45,2.25) 3(-3.45,1.75) 4(-3.45,1.25) 5(-3.45,0.75) 6(-3.45,0.25) 7(-3.45,-0.25) 8(-3.45,-0.75) 9(-3.45,-1.25) 10(-3.45,-1.75) 11(-3.45,-2.25) 12(-3.45,-2.75) 25(3.45,-2.75) 26(3.45,-2.25) 27(3.45,-1.75) 28(3.45,-1.25) 29(3.45,-0.75) 30(3.45,-0.25) 31(3.45,0.25) 32(3.45,0.75) 33(3.45,1.25) 34(3.45,1.75) 35(3.45,2.25) 36(3.45,2.75)
  rect 0.3x0.85 smd: 13(-2.75,-3.45) 14(-2.25,-3.45) 15(-1.75,-3.45) 16(-1.25,-3.45) 17(-0.75,-3.45) 18(-0.25,-3.45) 19(0.25,-3.45) 20(0.75,-3.45) 21(1.25,-3.45) 22(1.75,-3.45) 23(2.25,-3.45) 24(2.75,-3.45) 37(2.75,3.45) 38(2.25,3.45) 39(1.75,3.45) 40(1.25,3.45) 41(0.75,3.45) 42(0.25,3.45) 43(-0.25,3.45) 44(-0.75,3.45) 45(-1.25,3.45) 46(-1.75,3.45) 47(-2.25,3.45) 48(-2.75,3.45)
  rect 5.7x5.7 smd: 49(0,0)
  silkscreen extent -4,3.38 -3.75,3.63, body extent -3.5,-3.5 3.5,3.5, height 0.57
RESC1005X40X25LL05T05 [mm] "Chip Resistor, 2-Leads, Body 1.05x0.55mm, IPC High Density"
  rect 0.45x0.45 smd: 1(-0.4,0) 2(0.4,0)
  body extent -0.53,-0.28 0.53,0.28, height 0.4
RESC1005X40X25ML05T05 [mm] "Chip Resistor, 2-Leads, Body 1.00x0.50mm, IPC Low Density"
  rect 0.65x0.65 smd: 1(-0.5,0) 2(0.5,0)
  body extent -0.53,-0.27 0.53,0.28, height 0.4
RESC1005X40X25NL05T05 [mm] "Chip Resistor, 2-Leads, Body 1.00x0.50mm, IPC Medium Density"
  rect 0.55x0.55 smd: 1(-0.45,0) 2(0.45,0)
  body extent -0.53,-0.27 0.53,0.28, height 0.4
RESC1005X40X25NL10T10 [mm] "Chip Resistor, 2-Leads, Body 1.00x0.50mm, IPC Medium Density"
  rect 0.65x0.6 smd: 1(-0.425,0) 2(0.425,0)
  body extent -0.55,-0.3 0.55,0.3, height 0.4
SOIC127P700X220-4N [mm]
  rect 1.65x0.65 smd: 1(-3.25,0.635) 2(-3.25,-0.635) 3(3.25,-0.635) 4(3.25,0.635)
  silkscreen extent -4.08,-1.33 2.07,1.33, body extent -3.5,-1.33 3.5,1.33, height 2.2
SOP64P600X175-16N [mm]
  rect 1.52x0.44 smd: 1(-2.715,2.24) 2(-2.715,1.6) 3(-2.715,0.96) 4(-2.715,0.32) 5(-2.715,-0.32) 6(-2.715,-0.96) 7(-2.715,-1.6) 8(-2.715,-2.24) 9(2.715,-2.24) 10(2.715,-1.6) 11(2.715,-0.96) 12(2.715,-0.32) 13(2.715,0.32) 14(2.715,0.96) 15(2.715,1.6) 16(2.715,2.24)
  silkscreen extent -3.47,-2.45 1.61,2.81, body extent -3,-2.45 3,2.45, height 1.75
SOT-223-DB3_M [mm] "SOT223, 4-Leads, Body 6.5x3.5mm, Pitch 2.3mm, Lead Span 7mm, IPC Low Density"
  rect 2.5x1 smd: 1(-3.05,2.3) 2(-3.05,0) 3(-3.05,-2.3)
  rect 2.5x3.3 smd: 4(3.05,0)
  silkscreen extent -1.5,-3.35 1.5,3.35, body extent -1.85,-3.35 1.85,3.35, height 1.8
SOTFL50P160X60-6N [mm]
  rect 0.47x0.3 smd: 1(-0.835,0.5) 2(-0.835,0) 3(-0.835,-0.5) 4(0.835,-0.5) 5(0.835,0) 6(0.835,0.5)
  silkscreen extent -1.07,-0.8 0.25,0.9, body extent -0.8,-0.8 0.8,0.8, height 0.6
T491D [mm]
  rect 2.37x2.43 smd: 1(-3.12,0) 2(3.12,0)
  silkscreen extent -4.29,-2.15 3.65,2.26, body extent -3.8,-2.3 3.8,2.3, height 3.11
TESTPAD#1 [mil]
  oval 40x20 hole 10: 1(0,11.69)
TESTPAD#2 [mil]
  oval 86.61x62.99 hole 43.31: 1(0,11.69)
TESTPAD#3 [mil]
  oval 86.61x62.99 hole 43.31: 1(-0.79,11.69)
TESTPAD#4 [mil]
  rrect50% 393.7x196.85 hole 157.48 slot 314.96 at 0 deg: 1(88.5,23.46)
TESTPAD#5 [mil]
  oval 86.61x62.99 hole 43.31: 1(-5.79,11.69)
TESTPAD#6 [mil]
  rrect50% 393.7x196.85 hole 157.48 slot 314.96 at 0 deg: 1(111.46,63.46)
TESTPAD#7 [mil]
  rrect50% 393.7x196.85 hole 157.48 slot 314.96 at 0 deg: 1(-55.29,-2.55)
TestPad#1 [mm]
  oval 2.2x1.6 hole 1.1: 1(0,0)
TestPad#2 [mm]
  oval 1.016x0.508 hole 0.254: 1(0,0)
WE-PD_7345 [mm] "SMT Shielded Power Inductor, 2-leads, body 7.3x7.3mm"
  rect 1.6x2.2 smd: 1(-3.2,0) 2(3.2,0)
  Top Layer 1 keep-out region: -3.65,-3.65 -3.65,-1.3 -2.2,-1.3 -2.2,1.3 -3.65,1.3 -3.65,3.65 3.65,3.65 3.65,1.3 2.2,1.3 2.2,-1.3 3.65,-1.3 3.65,-3.65
  silkscreen extent -3.75,-3.75 3.75,3.75, body extent -3.65,-3.65 3.65,3.65, height 3.91
WL-SMCW_0603_150060XX75000 [mm] "SMD Mono-color Chip LED, body 1.60 x 0.80 mm"
  rect 0.8x0.8 smd: 1(-0.8,0) 2(0.8,0)
  silkscreen extent -1.55,-0.4 -1.4,0.4, body extent -0.8,-0.4 0.8,0.4, height 0.7
WL-SMCW_0603_150060xx75000 [mm] "SMD Mono-color Chip LED, body 1.60 x 0.80 mm"
  rect 0.8x0.8 smd: 1(-0.8,0) 2(0.8,0)
  silkscreen extent -1.55,-0.4 -1.4,0.4, body extent -0.8,-0.4 0.8,0.4, height 0.7
WSHP28181L000FEB [mm]
  rect 3.5x5.1 smd: 1(-2.055,0) 2(2.055,0)
  body extent -3.72,-2.3 3.38,2.3, height 1.5

## Part data
C1 C3: library part CMP-2006-02820-2, "Chip Multilayer Ceramic Capacitors for General Purpose, 0603, 2.2uF, X5R, 15%, 10%, 25V", Capacitance=2.2uF, Case Code (Imperial)=0603, Case Code (Metric)=1608, Dielectric=X5R, Max Operating Temperature=85°C, Min Operating Temperature=-55°C, Package Quantity=4000, Resistor Type=Ceramic, Tolerance=10%, Voltage=25V, Case/Package=0603, Depth=0.8mm, Height=0.8mm, Lead Free="Lead Free", Length=1.6mm, Material=Ceramic, Mount="Surface Mount", Number of Pins=2, Packaging="Tape and Reel", Radiation Hardening=No, REACH SVHC="No SVHC", Termination=SMD/SMT, Thickness=0.035inch, Voltage Rating=25V, Voltage Rating (DC)=25V, Weight=0.000222oz, Width=0.8mm
C2 C4: library part CMP-2006-02366-2, "Ceramic Capacitor for Automotive 220nF  ±10% 25VDC X7R 0603 Paper T/R", Capacitance=220nF, Case Code (Imperial)=0603, Case Code (Metric)=1608, Dielectric=X7R, Max Operating Temperature=125°C, Min Operating Temperature=-55°C, Package Quantity=1, Ratings=AEC-Q200, Tolerance=10%, Voltage=25V, Case/Package=0603, Depth=0.8mm, Height=0.8mm, Lead Free="Lead Free", Length=1.6mm, Mount="Surface Mount", Packaging="Tape and Reel", Radiation Hardening=No, Termination=SMD/SMT, Thickness=0.035inch, Voltage Rating=25V, Voltage Rating (DC)=25V, Width=0.031inch
C5 C8 C10 C12 C14 C18_PowerModuleCell_M1 C18_PowerModuleCell_M2 C18_PowerModuleCell_M3 C18_PowerModuleCell_M4 C19_PowerModuleCell_M1 C19_PowerModuleCell_M2 C19_PowerModuleCell_M3 C19_PowerModuleCell_M4 C26 C27 C29 C32: library part C0805C104M5RAC, "Capacitor", Manufacturer_Name=KEMET, Mouser Part Number=80-C0805C104M5RAC, Arrow Part Number=C0805C104M5RAC, Arrow Price/Stock=https://www.arrow.com/en/products/c0805c104m5rac/kemet-corporation?utm_currency=USD&region=nac, Datasheet Link=https://connect.kemet.com:7667/gateway/IntelliData-ComponentDocumentation/1.0/download/specsheet/C0805C104M5RAC%7bBULK%7d, Height=0.88mm, Manufacturer_Part_Number=C0805C104M5RAC, Mouser Price/Stock=https://www.mouser.co.uk/ProductDetail/KEMET/C0805C104M5RAC?qs=VOOUd%252Bza08rWzt4y8eXMuQ%3D%3D
C6 C30 C31: library part C0603C103J5RAC, "Capacitor", Manufacturer_Name=KEMET, Mouser Part Number=80-C0603C103J5RAC, Arrow Part Number=C0603C103J5RAC, Arrow Price/Stock=https://www.arrow.com/en/products/c0603c103j5rac/kemet-corporation?region=nac, Datasheet Link=https://www.kemet.com/specsheet/C0603C103J5RAC%7BBULK%7D, Height=0.87mm, Manufacturer_Part_Number=C0603C103J5RAC, Mouser Price/Stock=https://www.mouser.co.uk/ProductDetail/KEMET/C0603C103J5RAC?qs=Zjfhvh7dXTOjKlZBdCXdvg%3D%3D
C7 C15 C24 C25 C28: library part GRM155R61H105KE05J, "Capacitor", Manufacturer_Name="Murata Electronics", Mouser Part Number=81-GRM155R61H105KE5J, Arrow Part Number=GRM155R61H105KE05J, Arrow Price/Stock=https://www.arrow.com/en/products/grm155r61h105ke05j/murata-manufacturing?region=nac, Datasheet Link=https://search.murata.co.jp/Ceramy/image/img/A01X/G101/ENG/GRM155R61H105KE05-01A.pdf, Height=0.33mm, Manufacturer_Part_Number=GRM155R61H105KE05J, Mouser Price/Stock=https://www.mouser.co.uk/ProductDetail/Murata-Electronics/GRM155R61H105KE05J?qs=d0WKAl%252BL4KZilUxqJ3m7lA%3D%3D
C9 C11 C13 C43 C44 C45: library part GRM21BR61H475ME51L, "Capacitor", Manufacturer_Name="Murata Electronics", Mouser Part Number=81-GRM21BR61H475M51L, Arrow Part Number=GRM21BR61H475ME51L, Arrow Price/Stock=https://www.arrow.com/en/products/grm21br61h475me51l/murata-manufacturing?region=nac, Datasheet Link=https://search.murata.co.jp/Ceramy/image/img/A01X/G101/ENG/GRM21BR61H475ME51-01A.pdf, Height=1.45mm, Manufacturer_Part_Number=GRM21BR61H475ME51L, Mouser Price/Stock=https://www.mouser.co.uk/ProductDetail/Murata-Electronics/GRM21BR61H475ME51L?qs=eeBpzGFlv%252B%2Fg0wAeHy0eJw%3D%3D
C16_PowerModuleCell_M1 C16_PowerModuleCell_M2 C16_PowerModuleCell_M3 C16_PowerModuleCell_M4 C17_PowerModuleCell_M1 C17_PowerModuleCell_M2 C17_PowerModuleCell_M3 C17_PowerModuleCell_M4: library part CMP-06035-003661-1, "Chip Multilayer Ceramic Capacitors for General Purpose, 0402, 0.10uF, X7R, 15%, 10%, 25V", Capacitance=100nF, Case Code (Imperial)=0402, Case Code (Metric)=1005, Dielectric=X7R, Dielectric Material=Ceramic, Max Operating Temperature=125°C, Min Operating Temperature=-55°C, Package Quantity=10000, Tolerance=10%, Voltage=25V, Case/Package=0402, Depth=0.5mm, Height=0.5mm, Lead Free="Lead Free", Length=1mm, Mount="Surface Mount", Packaging="Tape and Reel", Resistor Type=Ceramic, Termination=SMD/SMT, Thickness=0.022inch, Voltage Rating=25V, Voltage Rating (DC)=25V, Weight=0.000212oz, Width=0.02inch
C20_PowerModuleCell_M1 C20_PowerModuleCell_M2 C20_PowerModuleCell_M3 C20_PowerModuleCell_M4 C21_PowerModuleCell_M1 C21_PowerModuleCell_M2 C21_PowerModuleCell_M3 C21_PowerModuleCell_M4: library part CMP-08246-003628-1, "Multilayer Ceramic Capacitors 470nF ±10% 50V X7R SMD 0603", Capacitance=470nF, Case Code (Imperial)=0603, Case Code (Metric)=1608, Dielectric=X7R, Dielectric Material=Ceramic, Max Operating Temperature=125°C, Min Operating Temperature=-55°C, Package Quantity=4000, Tolerance=10%, Voltage=50V, Case/Package=0603, Construction=Flat, Depth=0.8mm, Height=0.8mm, Lead Free="Lead Free", Length=1.6mm, Mount="Surface Mount", Packaging="Cut Tape", Radiation Hardening=No, REACH SVHC="No SVHC", Resistor Type=Ceramic, RoHS Compliant=Yes, Series=C, Termination=SMD/SMT, Thickness=0.037inch, Voltage Rating=50V, Voltage Rating (DC)=50V, Weight=7.1E-05oz, Width=0.031inch
C22: library part GRM21BC71E475KE11L, "Capacitor", Manufacturer_Name="Murata Electronics", Mouser Part Number=81-GRM21BC71E475KE1L, Arrow Part Number=GRM21BC71E475KE11L, Arrow Price/Stock=https://www.arrow.com/en/products/grm21bc71e475ke11l/murata-manufacturing, Datasheet Link=https://search.murata.co.jp/Ceramy/image/img/A01X/G101/ENG/GRM21BC71E475KE11-01A.pdf, Height=1.45mm, Manufacturer_Part_Number=GRM21BC71E475KE11L, Mouser Price/Stock=https://www.mouser.co.uk/ProductDetail/Murata-Electronics/GRM21BC71E475KE11L?qs=hNud%2FORuBR02yf5e5nzFMA%3D%3D
C23: library part T491D106K050AT, "Capacitor Polarised", Manufacturer_Name=KEMET, Mouser Part Number=80-T491D106K050, Arrow Part Number=T491D106K050AT, Arrow Price/Stock=https://www.arrow.com/en/products/t491d106k050at/kemet-corporation?region=nac, Datasheet Link=https://content.kemet.com/datasheets/KEM_T2005_T491.pdf, Height=3.1mm, Manufacturer_Part_Number=T491D106K050AT, Mouser Price/Stock=https://www.mouser.co.uk/ProductDetail/KEMET/T491D106K050AT?qs=ohfon0hxEDckuN%2F%252ByCig%2FQ%3D%3D
C42: library part CMP-13271-003570-1, "Cap Ceramic 10uF 50V X7R ±10% SMD 1210 +125°C Embossed T/R", Capacitance=10uF, Case Code (Imperial)=1210, Case Code (Metric)=3225, Max Operating Temperature=125°C, Min Operating Temperature=-55°C, Tolerance=10%, Voltage Rating=50V, Case/Package=1210, Features="Soft Termination", Mount="Surface Mount", Packaging="Cut Tape"
D1: library part CMP-1426-00005-3, "WL-SMCW SMT Mono-Color Chip LED Waterclear", Case Code (Imperial)=0603, Case Code (Metric)=1608, Color=Yellow, Forward Current=100mA, Forward Voltage=2V, Max Junction Temperature (Tj)=95°C, Max Operating Temperature=85°C, Max Reverse Voltage (DC)=5V, Min Operating Temperature=-40°C, Power Dissipation=72mW, Test Current=20mA, Case/Package=0603, Dominant Wavelength=590nm, Height=700µm, Length=1.6mm, Lens Style="Clear, Rectangular", Luminous Intensity=120mcd, Mount="Surface Mount", Packaging="Tape and Reel", Peak Wavelength=595nm, REACH SVHC=Unknown, Reverse Voltage=5V, RoHS=Compliant, Viewing Angle=140°, Wavelength=590nm, Width=800µm
D2: library part CMP-03913-89970694-2, "WL-SMCW SMT Mono-Color Chip LED Waterclear", Forward Current=100mA, Forward Voltage=2V, Max Operating Temperature=85°C, Max Reverse Voltage (DC)=5V, Min Operating Temperature=-40°C, Dominant Wavelength=605nm, Luminous Intensity=130mcd, Packaging="Tape and Reel", Peak Wavelength=610nm, RoHS=Compliant, Viewing Angle=140°, Wavelength=605nm
D3 D4 D10_PowerModuleCell_M1 D10_PowerModuleCell_M2 D10_PowerModuleCell_M3 D10_PowerModuleCell_M4: library part CMP-1426-00001-4, "LED Low-Power Uni-Color Red 630nm 2V 2-Pin Chip 0603(1608Metric) T/R", Case Code (Imperial)=0603, Case Code (Metric)=1608, Color=Red, Forward Current=100mA, Forward Voltage=2V, Max Junction Temperature (Tj)=95°C, Max Operating Temperature=85°C, Max Reverse Voltage (DC)=5V, Min Operating Temperature=-40°C, Power Dissipation=72mW, Test Current=20mA, Case/Package=0603, Dominant Wavelength=625nm, Height=700µm, Length=1.6mm, Lens Style="Clear, Rectangular", Luminous Intensity=250mcd, Mount="Surface Mount", Packaging="Tape and Reel", Peak Wavelength=630nm, REACH SVHC=Unknown, Reverse Voltage=5V, RoHS=Compliant, Viewing Angle=140°, Wavelength=625nm, Width=800µm
D5 D6 D8: library part CMP-1426-00002-4, "430mcd Colorless transparence 520nm Emerald 140° LED0603 Light Emitting Diodes (LED) ROHS", Case Code (Imperial)=0603, Case Code (Metric)=1608, Color=Green, Forward Current=100mA, Forward Voltage=3.2V, Max Junction Temperature (Tj)=95°C, Max Operating Temperature=85°C, Max Reverse Voltage (DC)=5V, Min Operating Temperature=-40°C, Output Current=10µA, Power Dissipation=105mW, Test Current=20mA, Case/Package=0603, Dominant Wavelength=525nm, Height=700µm, Lead Free="Lead Free", Length=1.6mm, Lens Style="Clear, Rectangular", Luminous Intensity=430mcd, Mount="Surface Mount", Packaging="Tape and Reel", Peak Wavelength=515nm, REACH SVHC=Unknown, Reverse Voltage=5V, RoHS=Compliant, Viewing Angle=140°, Wavelength=525nm, Width=800µm
D7 D9: library part CMP-1426-00003-4, "Led, Blue, 470 Nm, 3.2 V, 30 Ma, 145 Mcd Rohs Compliant: Yes", Case Code (Imperial)=0603, Case Code (Metric)=1608, Color=Blue, Forward Current=100mA, Forward Voltage=3.2V, Max Junction Temperature (Tj)=95°C, Max Operating Temperature=85°C, Max Reverse Voltage (DC)=5V, Min Operating Temperature=-40°C, Power Dissipation=105mW, Test Current=20mA, Case/Package=0603, Dominant Wavelength=470nm, Height=700µm, Length=1.6mm, Lens Style="Clear, Rectangular", Luminous Intensity=145mcd, Mount="Surface Mount", Packaging="Tape and Reel", Peak Wavelength=465nm, REACH SVHC=Unknown, Reverse Voltage=5V, RoHS=Compliant, Viewing Angle=140°, Wavelength=470nm, Width=800µm
D11: "Schottky Diode", Manufacturer_Name="Comchip Technology", Mouser Part Number=750-CDBU0245, Arrow Part Number=CDBU0245, Arrow Price/Stock=https://www.arrow.com/en/products/cdbu0245/comchip-technology?utm_currency=USD&region=nac, Datasheet Link=https://componentsearchengine.com/Datasheets/1/CDBU0245.pdf, Height=0.85mm, Manufacturer_Part_Number=CDBU0245, Mouser Price/Stock=https://www.mouser.co.uk/ProductDetail/Comchip-Technology/CDBU0245?qs=tw%252BuQ%2FB6PO2XscGM2Q%2FbYQ%3D%3D
IC1: "Integrated Circuit", Manufacturer_Name=STMicroelectronics, Mouser Part Number=511-STM32G431CBU6, Arrow Part Number=STM32G431CBU6, Arrow Price/Stock=https://www.arrow.com/en/products/stm32g431cbu6/stmicroelectronics?utm_currency=USD&region=nac, Datasheet Link=https://www.st.com/resource/en/datasheet/stm32g431cb.pdf, Height=0.65mm, Manufacturer_Part_Number=STM32G431CBU6, Mouser Price/Stock=https://www.mouser.co.uk/ProductDetail/STMicroelectronics/STM32G431CBU6?qs=T3oQrply3y%252B0hTuSHQ7oqA%3D%3D
IC2: "Integrated Circuit", Manufacturer_Name="Analog Devices", Mouser Part Number=584-ADUM1440ARQZ, Arrow Part Number=ADUM1440ARQZ, Arrow Price/Stock=https://www.arrow.com/en/products/adum1440arqz/analog-devices?region=europe, Datasheet Link=https://componentsearchengine.com/Datasheets/2/ADUM1440ARQZ.pdf, Height=1.75mm, Manufacturer_Part_Number=ADUM1440ARQZ, Mouser Price/Stock=https://www.mouser.co.uk/ProductDetail/Analog-Devices/ADUM1440ARQZ?qs=613q%2FuFLIwR2r1IGUGbFKA%3D%3D
IC3: "Integrated Circuit", Manufacturer_Name=Toshiba, Datasheet Link=https://toshiba.semicon-storage.com/info/docget.jsp?did=59174&prodName=TCK402G, Height=0.59mm, Manufacturer_Part_Number=TCK402G
J1: "Connector", Manufacturer_Name="Phoenix Contact", Mouser Part Number=651-1725656, Arrow Part Number=1725656, Arrow Price/Stock=https://www.arrow.com/en/products/1725656/phoenix-contact?utm_currency=USD&region=nac, Datasheet Link=https://www.phoenixcontact.com/online/portal/us/?uri=pxc-oc-itemdetail:pid=1725656&library=usen&pcck=P-11-01-05&tab=1&selectedCategory=ALL, Height=8.65mm, Manufacturer_Part_Number=1725656, Mouser Price/Stock=https://www.mouser.co.uk/ProductDetail/Phoenix-Contact/1725656?qs=Ul7CXFMnlWWQeccayYbRmw%3D%3D
J2 J3 J4 J5 J6 J7 J12 J13: library part CMP-1502-01316-3, Contact Resistance=20mΩ, Current Rating=3A, Operating Supply Voltage=250V, Gender=Female, Lead Pitch=2.54mm, NexarPartId=61924712, Number of Pins=4, Orientation=Vertical, RoHS=Non-Compliant
J8 J9: library part CMP-04776-000999-1, "CONN HEADER R/A 8POS 3MM", Case/Package=0802, Color=Black, Contact Resistance=10mR, Current Rating=5A, Flammability Rating="UL94 V-0", Insulation Resistance=1GR, Max Operating Temperature=105°C, Max Voltage Rating (DC)=250.25kV, Min Operating Temperature=-40°C, Package Quantity=1440, Voltage Rating=250V, Connector Type=Plug, Contact Material=Brass, Contact Plating=Gold, Depth=12.2mm, Diameter=3mm, Gender=Male, Glow Wire Compliant=Compliant, Halogen Free="Low Halogen", Height=8.77mm, Housing Color=Black, Housing Material=Thermoplastic, Lead Free="Lead Free", Length=16.15mm, Max Current Rating=5A, Mount="Through Hole", Number of Circuits=8, Number of Contacts=8, Number of Positions=8, Number of Rows=2, Orientation="Right Angle", Packaging=Tray, Pitch=3mm, Radiation Hardening=No, Reach SVHC Compliant=Yes, RoHS Compliant=Yes, Row Spacing=3mm, Series="Micro-Fit 3.0", Termination=Solder, Voltage Rating (DC)=250V